# EAGLE board Adafruit MCP3421 ADC (EAGLE 9.6.2)
REV: A
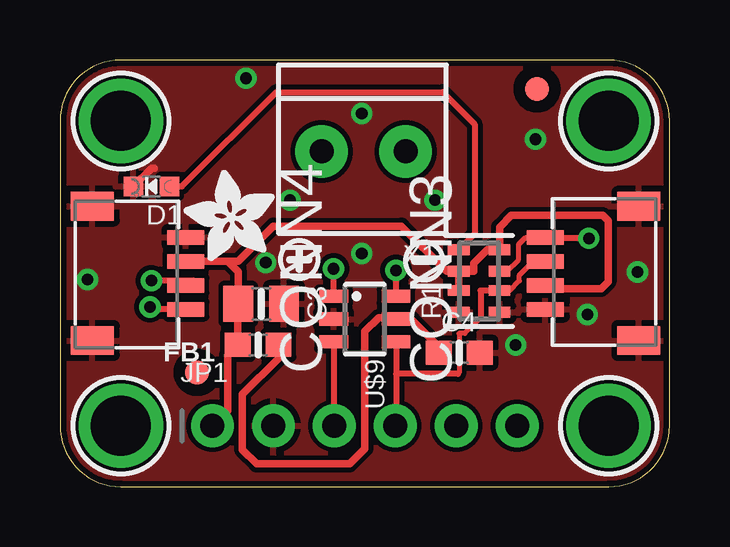
[diagram p0: board, top side]
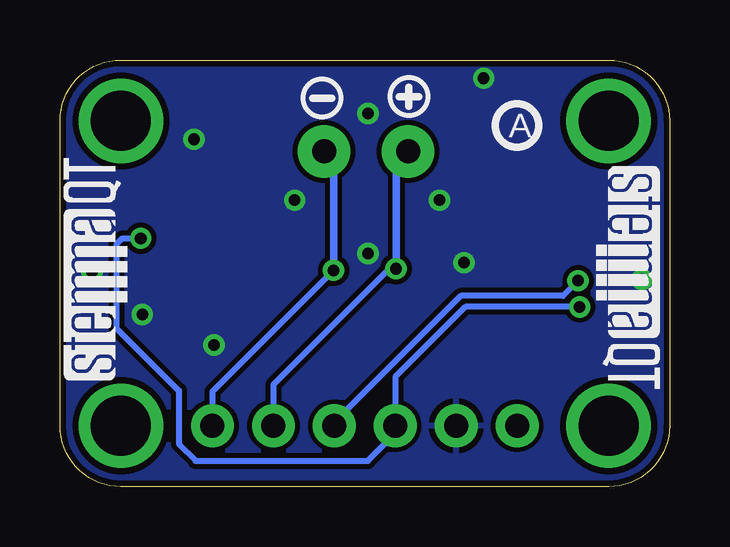
[diagram p1: board, bottom side, seen from below]

Size 25.4 x 17.78 mm. Coordinates in mm from the lower left corner, seen from the top.
Outline: 0,15.24 0,2.54 arc90 2.54,0 22.86,0 arc90 25.4,2.54 25.4,15.24 arc90 22.86,17.78 2.54,17.78 arc90 0,15.24
Copper layers (1*16): Top 0.035mm / dielectric 1.5mm / Bottom 0.035mm
Design rules "adafruit 8-8": minimum track width 6mil, minimum drill 15.5mil, track to track 8mil, track to pad 8mil, pad to pad 8mil, via to via 8mil, smd to smd 8mil, copper to edge 10mil, drill to drill 8mil, minimum pad ring 10mil, minimum via ring 8mil, stop-mask expansion 2mil, vias tented up to drill 20mil, thermal gap 10mil
Net classes: 1 highpower: width 0.305 mm, drill 0.483 mm; 2 lowpower: width 0.254 mm, drill 0.483 mm

## Footprints (pad centres in the part's own frame; a part is rotated, then mirrored left to right if it is on the bottom)
0805-NO = smd 1.24 x 1.5: 1 -0.95,0; 2 0.95,0
0603-NO = smd 1.075 x 1: 1 -0.85,0; 2 0.85,0
JST_SH4 = smd 0.6 x 1.55: 1 -1.5,2.006; 2 -0.5,2.006; 3 0.5,2.006; 4 1.5,2.006 | smd 1.2 x 1.8: MT1 -2.8,-1.894; MT2 2.8,-1.894
CHIPLED_0603_NOOUTLINE = smd 0.8 x 0.8: A 0,-0.75; C 0,0.75
FIDUCIAL_1MM = smd 1 x 1: 1 0,0
1X06_ROUND_70 = drill 1 pad 1.778: 1 -6.35,0; 2 -3.81,0; 3 -1.27,0; 4 1.27,0; 5 3.81,0; 6 6.35,0
RESPACK_4X0603 = smd 0.45 x 0.9: 1 -1.3,-0.85; 2 -0.4,-0.85; 3 0.4,-0.85; 4 1.3,-0.85; 5 1.3,0.85; 6 0.4,0.85; 7 -0.4,0.85; 8 -1.3,0.85
SOT23-6 = smd 0.55 x 1.2: 1 -0.95,-1.3; 2 0,-1.3; 3 0.95,-1.3; 4 0.95,1.3; 5 0,1.3; 6 -0.95,1.3
MOUNTINGHOLE_2.5_PLATED = drill 2.5 pad 3.2: P$1 0,0
TERMBLOCK_1X2-3.5MM = drill 1 pad 2.184: 1 1.8,0; 2 -1.7,0

## Placement (x,y rotation side)
C3  10uF  [0805-NO]  8.38,7.62 0 top
C4  0.1uF  [0603-NO]  16.64,5.59 0 top
CONN3  STEMMA_I2C_QT  [JST_SH4]  22.23,8.89 90 top
CONN4  STEMMA_I2C_QT  [JST_SH4]  3.24,8.89 270 top
D1  GREEN  [CHIPLED_0603_NOOUTLINE]  3.81,12.51 90 top
FB1  FERRITE  [0603-NO]  8.26,5.91 180 top
FID3  FIDUCIAL_1MM  [FIDUCIAL_1MM]  5.71,4.76 0 top
FID4  FIDUCIAL_1MM  [FIDUCIAL_1MM]  19.88,16.57 0 top
JP1  [1X06_ROUND_70]  12.7,2.54 0 top
PLABEL0  [PLABEL0]  6.35,0.89 0 top
PLABEL1  [PLABEL1]  8.89,4.19 0 top
PLABEL2  [PLABEL2]  11.43,0.89 0 top
PLABEL3  [PLABEL3]  13.97,4.19 0 top
PLABEL4  [PLABEL4]  16.64,0.89 0 top
PLABEL5  [PLABEL5]  19.05,4.19 0 top
PLABEL6  [PLABEL6]  8.7,15.05 0 top
PLABEL7  [PLABEL7]  16.45,14.73 0 top
PLABEL8  [PLABEL8]  0.25,12.38 0 top
PLABEL9  [PLABEL9]  12.95,11.81 0 bottom
PLABEL10  [PLABEL10]  12.95,7.87 0 bottom
PLABEL11  [PLABEL11]  12.64,0.95 0 bottom
PLABEL12  [PLABEL12]  12.64,4.13 0 bottom
R1  10K Pack  [RESPACK_4X0603]  17.46,8.57 90 top
U$2  [SYMBOL_PLUS]  9.97,9.46 0 top
U$4  [SYMBOL_MINUS]  15.18,9.4 0 top
U$5  [SYMBOL_MINUS]  14.48,16.19 0 bottom
U$7  [SYMBOL_PLUS]  10.86,16.26 0 bottom
U$8  [PCBFEAT-REV-040]  6.35,15.05 0 bottom
U$9  MCP3421  [SOT23-6]  12.7,6.99 270 top
U$20  MOUNTINGHOLE2.5  [MOUNTINGHOLE_2.5_PLATED]  2.54,15.24 0 top
U$21  MOUNTINGHOLE2.5  [MOUNTINGHOLE_2.5_PLATED]  22.86,15.24 0 top
U$25  MOUNTINGHOLE2.5  [MOUNTINGHOLE_2.5_PLATED]  2.54,2.54 0 top
U$27  MOUNTINGHOLE2.5  [MOUNTINGHOLE_2.5_PLATED]  22.86,2.54 0 top
U$29  [ADAFRUIT_3.5MM]  8.95,9.4 90 top
U$31  [STEMMAQT]  22.61,4.45 90 bottom
U$32  [STEMMAQT]  3.05,13.34 270 bottom
X1  3.5mm Terminal Block  [TERMBLOCK_1X2-3.5MM]  12.7,13.97 180 top

## Library data of the parts
C3 C4 FB1 JP1 R1 U$2 U$4 U$5 U$7 U$29 = microbuilder
CONN3 CONN4 = adafruit_electromech; LCSC: C2845363
D1 U$9 = microbuilder; ROT: 270
FID3 FID4 = microbuilder; BOM: EXCLUDE
PLABEL0 PLABEL1-PLABEL12 = pinguin
U$8 = microbuilder; REV: A
U$20 U$21 U$25 U$27 = adafruit_electromech; BOM: EXCLUDE
U$31 U$32 = silks
X1 = adafruit_electromech; FORCETHM: 1

## Nets
GND: C3.2 C4.2 CONN3.1 CONN3.MT1 CONN3.MT2 CONN4.1 CONN4.MT1 CONN4.MT2 D1.C JP1.2 R1.1 R1.8 U$9.2
N$1: D1.A R1.5
SCL: CONN3.4 CONN4.4 JP1.3 R1.3 U$9.3
SDA: CONN3.3 CONN4.3 JP1.4 R1.2 U$9.4
VCC [highpower]: C3.1 CONN3.2 CONN4.2 FB1.2 JP1.1 R1.4 R1.6 R1.7
VDD [highpower]: C4.1 FB1.1 U$9.5
VIN+: JP1.5 U$9.1 X1.1
VIN-: JP1.6 U$9.6 X1.2

## Tracks (layer width: path | path; a pad name or v marks a point on that pad's centre or on a via)
GND  (via drill 0.48)
  Top 0.305: D1.C 3.82,13.27 3.94,13.27
  other vias: 24.07,8.95 21.97,7.18 12.57,9.72 8.57,9.33 18.99,5.91 1.14,8.64 12.57,15.56 15.62,11.94 9.59,11.94 7.75,17.02 19.81,14.48
  pour Top: 0,17.78 25.4,17.78 25.4,0 0,0
  pour Bottom: 0,17.78 25.4,17.78 25.4,0 0,0
N$1
  Top 0.254: R1.5 17.27,10.53 17.27,15.11 15.94,16.45 9.02,16.45 5.08,12.51 D1.A
SCL  (via drill 0.48)
  Top 0.203: R1.3 18.62,8.97 19.11,9.46 19.11,10.1 19.41,10.39 CONN3.4
  Top 0.254: U$9.3 11.4,2.57 JP1.3 | v22.04,10.35 19.75,10.35 CONN3.4 | CONN4.4 3.85,7.39 v3.75,7.49
  Bottom 0.254: v22.04,10.35 22.8,10.35 23.05,10.1 23.05,6.6 20.45,4 20.45,1.78 19.75,1.08 12.57,1.08 11.43,2.22 JP1.3 11.43,4.57 8.51,7.49 v3.75,7.49
SDA  (via drill 0.48)
  Top 0.203: R1.2 18.74,8.17 19.14,8.57 19.14,8.82 19.71,9.39 CONN3.3 | 17.53,7.05 16.87,6.39 16.63,6.39 16.63,4.75 16.57,4.7
  Top 0.254: U$9.4 14,4.7 | 14,4.7 14,2.57 JP1.4 | R1.2 17.53,8.17 17.53,7.05 | CONN4.3 5.56,8.59 v3.81,8.59 | 16.57,4.7 14,4.7
  Bottom 0.254: v3.81,8.59 4.45,7.95 8.7,7.95 13.97,2.68 JP1.4
VCC
  Top 0.305: R1.7 R1.6 | R1.6 17.25,8.97 17.25,9.31 17.81,9.87 R1.4 18.31,10.82 18.8,11.3 22.61,11.3 22.84,11.07 22.84,8.55 22.54,8.26 19.85,8.26 CONN3.2 | CONN4.2 6.99,9.39 | 6.99,9.39 7.43,8.95 C3.1 7.41,7.59 FB1.2 6.99,5.49 6.99,3.18 JP1.1 | 6.99,9.39 7.42,9.39 8.89,10.86 14.22,10.86 16.11,8.97 R1.6
VDD
  Top 0.305: FB1.1 9.11,5.36 7.59,3.85 7.59,1.55 8.19,0.95 12.06,0.95 12.7,1.59 12.7,6.48 13.27,7.05 13.94,7.05 U$9.5 14.64,6.99 15.79,5.84 C4.1
VIN+  (via drill 0.48)
  Top 0.254: U$9.1 v11.4,9.08
  Bottom 0.254: v11.4,9.08 11.68,9.08 16.51,4.25 JP1.5
  Bottom 0.305: X1.1 11.4,13.34 v11.4,9.08
VIN-  (via drill 0.48)
  Top 0.254: U$9.6 v14,9.02
  Bottom 0.254: v14,9.02 19.05,3.97 JP1.6
  Bottom 0.305: v14,9.02 14,13.44 X1.2

## Text on the board
Pinguin_tBackup: MCP / 3421 | 18 / bit / ADC | on | GND | SDA | V- | VIN | SCL | V+
Pinguin_bBackup: MCP3421 | 18-bit ADC / 1-4x PGA / ±2V diff. input | I2C Addr 0x68 | VLogic/Vcc: 3-5VDC